# Altium PCB PELT_DRIVE.PcbDoc (part 1 of 2)
Units mm, origin at the board's own origin, x right, y up, seen from the top; angles counter-clockwise.
Board outline 100 x 36 mm, 2 copper layers (Top Layer, Bottom Layer), stack 1.071 mm thick; 61 components, 46 nets, 221 pads, 71 vias.
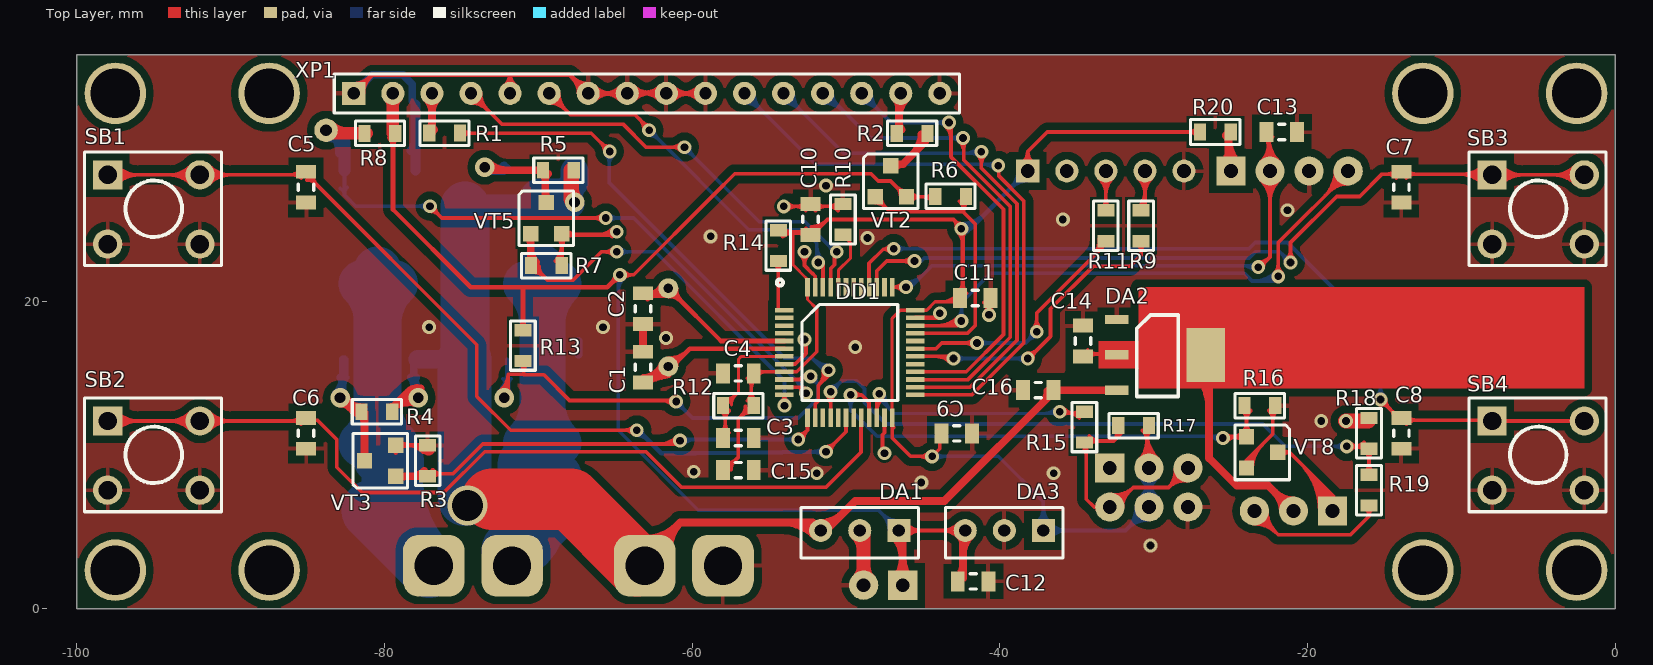
[diagram p0: Top Layer view]
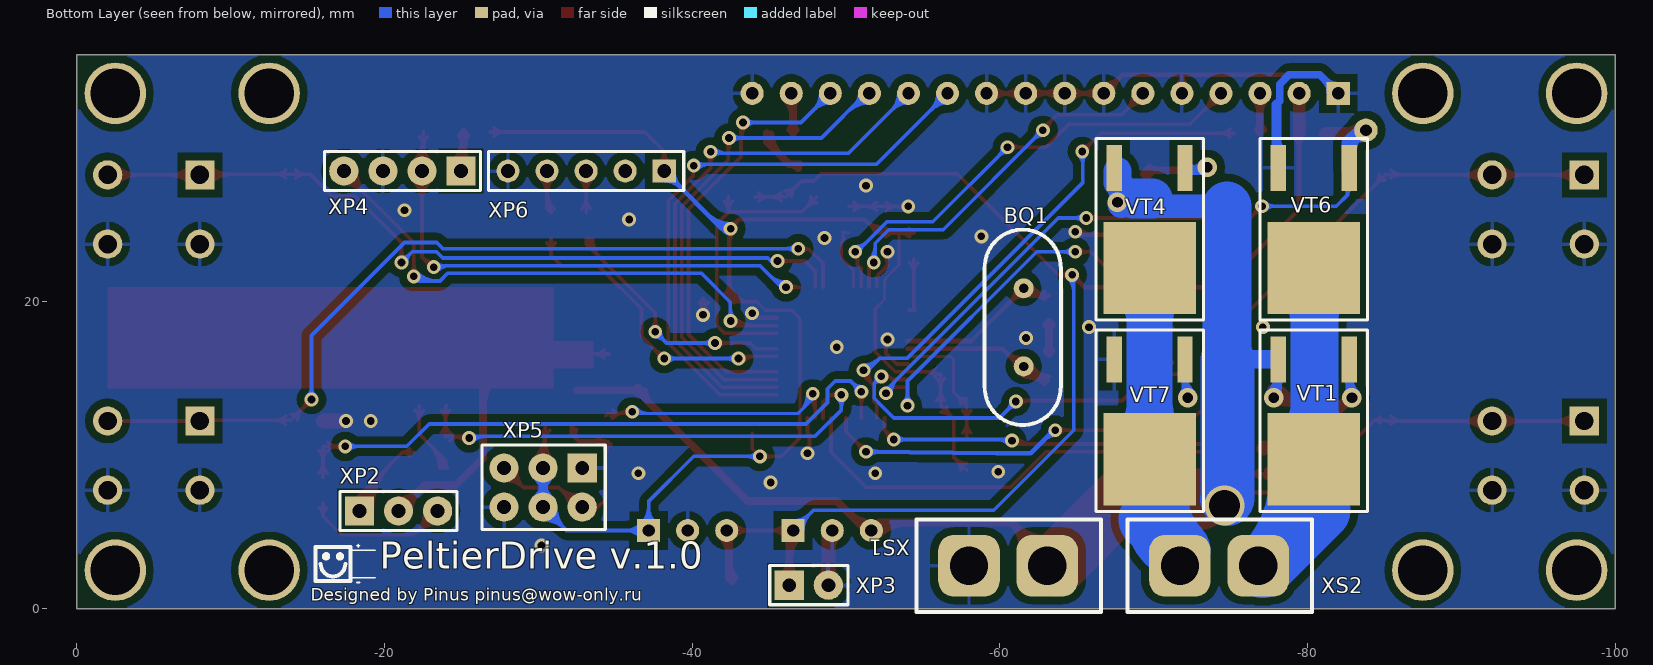
[diagram p1: Bottom Layer view, seen from below]

## Layer stack, top to bottom
Top Solder: solder mask 0.0102, Solder Resist, Dk 3.5
Top Layer: signal copper 0.0356
Dielectric1: core 1, FR-4, Dk 4.8
Bottom Layer: signal copper 0.0356
Bottom Solder: solder mask 0.0102, Solder Resist, Dk 3.5

## Board outline
-100,0 0,0 0,36 -100,36

## Design rules (kind name [scope] priority, off if disabled: settings)
Clearance Clearance_1 [InPolygon] p1: gap=0.5
Clearance [All] p2: gap=0.2
HoleSize HoleSize_1 [All] p1: absolutevalues=TRUE maxlimit=4 minlimit=0.025 maxpercent=80.000 minpercent=20.000
HoleSize [All] p2: absolutevalues=TRUE maxlimit=2.54 minlimit=0.025 maxpercent=80.000 minpercent=20.000
MinimumSolderMaskSliver MinimumSolderMaskSliver_1 [All] p1: minsoldermaskwidth=0
MinimumSolderMaskSliver [All] p2: minsoldermaskwidth=0
PlaneClearance [All] p1: clearance=1
PlaneClearance PlaneClearance_2 [All] p2: clearance=0.508
PlaneClearance PlaneClearance_1 [All] p3: clearance=0.508
PlaneConnect [All] p1: planeconnectstyle=Relief reliefexpansion=0.508 reliefentries=4 reliefconductorwidth=0.254 reliefairgap=0.5
PlaneConnect PlaneConnect_1 [All] p2: planeconnectstyle=Relief reliefexpansion=0.508 reliefentries=4 reliefconductorwidth=0.254 reliefairgap=0.254
PolygonConnect PolygonConnect_isVia [isVia] p1: connectstyle=Direct reliefconductorwidth=0.254 reliefentries=4 polygonreliefangle="90 Angle" airgapwidth=0.254
PolygonConnect [All] p2: connectstyle=Relief reliefconductorwidth=0.254 reliefentries=4 polygonreliefangle="90 Angle" airgapwidth=0.5
RoomDefinition PELT_DRIVE [InComponentClass('PELT_DRIVE')] p1: confinementstyle=ConfineIn formatcopy=TRUE lockcomponents=FALSE outline -103.97,-11.23 25.7,-11.23 25.7,38.862 -103.97,38.862
RoutingVias [All] p1: holewidth=0.711 width=1.27 viastyle="Through Hole" minholewidth=0.2 minwidth=0.6 maxholewidth=8 maxwidth=9.27
SMDToPlane [All] p1: distance=1968504
SilkToSilkClearance SilkToSilkClearance_1 [All] p1: silktosilkclearance=0
SilkToSilkClearance [All] p2: silktosilkclearance=0
SilkToSolderMaskClearance [IsPad] p1: minsilkscreentomaskgap=0 clearancetoexposedcopper=TRUE
SolderMaskExpansion [All] p1: expansion=0.1
Width Width_1 [All] p1: maxlimit=5 minlimit=0.1 preferedwidth=0.3 minimp=50.000000 maximp=50.000000 favimp=50.000000
Width [All] p2: maxlimit=5 minlimit=0.254 preferedwidth=0.254
24 further rules are at their usual default settings.

## Components (designator, comment, footprint, x,y, rotation, side; value= is the part's Value field where it differs from the comment)
BQ1 "8M" "HC 49S" -61.552,13.97 r90 bottom
C1 "20" Cap_0805 -63.2,15.7 r270 top
C2 "20" Cap_0805 -63.2,19.5 r90 top
C3 "0,01uF" Cap_0805 -57,11.1 r180 top
C4 "0.47uF" Cap_0805 -57,15.3 r0 top
C5 "0,01uF" Cap_0805 -85.1,27.4 r270 top
C6 "0,01uF" Cap_0805 -85.1,11.4 r270 top
C7 "0,01uF" Cap_0805 -13.9,27.4 r270 top
C8 "0,01uF" Cap_0805 -13.9,11.4 r270 top
C9 "0.47uF" Cap_0805 -42.8,11.4 r180 top
C10 "0.47uF" Cap_0805 -52.3,25.3 r270 top
C11 "0.47uF" Cap_0805 -41.6,20.2 r180 top
C12 "0.47uF" Cap_0805 -41.74,1.778 r180 top
C13 "100" Cap_0805 -21.674,30.988 r180 top
C14 "4,7uF" Cap_0805 -34.6,17.4 r270 top
C15 "0.47uF" Cap_0805 -57,9 r180 top
C16 "0.47uF" Cap_0805 -37.5,14.2 r0 top
DA1 "L78L05" kren -51.646,5.08 r90 top
DA2 "TLV1117 12" SOT223 -29.9,16.8 r180 top
DA3 "L78L03" kren -42.248,5.08 r90 top
DD1 "STM32F100C8T6B" LQFP48 -54,19.4 r0 top
R1 "1k" Res_0805 -76.1,30.91 r180 top
R2 "1k" Res_0805 -45.7,30.9 r180 top
R3 "1k" Res_0805 -77.2,9.616 r90 top
R4 "1k" Res_0805 -80.5,12.8 r180 top
R5 "1k" Res_0805 -68.7,28.5 r0 top
R6 "10k" Res_0805 -43.2,26.8 r0 top
R7 "1k" Res_0805 -69.484,22.3 r180 top
R8 "1k" Res_0805 -80.3,30.9 r0 top
R9 "100" Res_0805 -30.818,24.892 r270 top
R10 "10k" Res_0805 -50.2,25.3 r90 top
R11 "100" Res_0805 -33.104,24.892 r270 top
R12 "51k" Res_0805 -57,13.2 r0 top
R13 "1k" Res_0805 -71,17.1 r270 top
R14 "10" Res_0805 -54.4,23.6 r90 top
R15 "220" Res_0805 -34.5,11.8 r90 top
R16 "1k" Res_0805 -23.1,13.2 r0 top
R17 "5.1k" Res_0805 -31.3,11.9 r0 top
R18 "10k" Res_0805 -16,11.4 r270 top
R19 "27k" Res_0805 -16,7.7 r90 top
R20 "10k" Res_0805 -25.992,30.988 r180 top
SB1 "BUTTON 4.5x6" "BUTTON 6x4.5" -98,28.2 r0 top
SB2 "BUTTON 4.5x6" "BUTTON 6x4.5" -98,12.2 r0 top
SB3 "BUTTON 4.5x6" "BUTTON 6x4.5" -8,28.2 r0 top
SB4 "BUTTON 4.5x6" "BUTTON 6x4.5" -8,12.2 r0 top
VT1 "NVD5117PL" TO-252 -81.11,9.906 r0 bottom
VT2 "IRLML9303" SOT-23 -48.1,28.8 r0 top
VT3 "N-CHAN_SOT-23" SOT-23 -81.3,8.6 r90 top
VT4 "NVD5117PL" TO-252 -70.442,22.352 r0 bottom
VT5 "N-CHAN_SOT-23" SOT-23 -70.5,26.4 r0 top
VT6 "2SK3919" TO-252 -81.11,22.352 r0 bottom
VT7 "2SK3919" TO-252 -70.442,9.906 r0 bottom
VT8 "N-CHAN_SOT-23" SOT-23 -21.928,11.176 r270 top
XP1 "DISP16_2.54" DISP16_2.54 -82,33.5 r90 top
XP2 "COOLER" CONN_2.54_3 -18.372,6.35 r90 bottom
XP3 "CONNECT_2.54_2" CONN_2.54_2 -46.312,1.524 r90 bottom
XP4 "SWD" CONN_2.54_4 -24.976,28.448 r270 bottom
XP5 "PLD-6" CONN_2.54_6_2 -32.85,9.144 r270 bottom
XP6 "UART_CONN" CONN_2.54_5 -38.184,28.448 r270 bottom
XS1 "Feed" PELTIER -63.584,2.794 r270 bottom
XS2 "PELTIER" PELTIER -77.3,2.794 r270 bottom

## Footprints (in the part's own frame and the unit in brackets; to place one, negate y for a bottom-side part, rotate by r counter-clockwise, add the part's x,y. Pads: shape width x height; smd on the part's side, far side on the other; paste and mask are expansions set on the pad)
"BUTTON 6x4.5" [mm]
  round 1.9 hole 1.2: 1(6,0) 2(6,-4.5) 2_1(0,-4.5)
  rect 1.9x1.9 hole 1.2: 1_1(0,0)
  silkscreen extent -1.5,-5.9 7.4,1.5
Cap_0805 [mm] "Chip, Body 1.6x0.85mm, IPC High Density"
  rect 0.9x1.3 smd: 1(-1,0) 2(1,0)
  silkscreen extent -0.2,-0.5 0.2,0.5, body extent -1,-0.62 1,0.63, height 0.78
CONN_2.54_2 [mm]
  rect 1.9x1.9 hole 0.9: 1(0,0)
  round 1.9 hole 0.9: 2(0,-2.54)
  silkscreen extent -1.27,-3.81 1.27,1.27
CONN_2.54_3 [mm]
  rect 1.9x1.9 hole 0.9: 1(0,0)
  round 1.9 hole 0.9: 2(0,-2.54) 3(0,-5.08)
  silkscreen extent -1.27,-6.35 1.27,1.27
CONN_2.54_4 [mm]
  rect 1.9x1.9 hole 0.9: 1(0,0)
  round 1.9 hole 0.9: 2(0,-2.54) 3(0,-5.08) 4(0,-7.62)
  silkscreen extent -1.27,-8.89 1.27,1.27
CONN_2.54_5 [mm]
  rect 1.5x1.5 hole 0.9: 1(0,0)
  round 1.5 hole 0.9: 2(0,-2.54) 3(0,-5.08) 4(0,-7.62) 5(0,-10.16)
  silkscreen extent -1.27,-11.43 1.27,1.27
CONN_2.54_6_2 [mm]
  rect 1.9x1.9 hole 0.9: 1(0,0)
  round 1.9 hole 0.9: 2(2.54,0) 3(0,-2.54) 4(2.54,-2.54) 5(0,-5.08) 6(2.54,-5.08)
  silkscreen extent -1.5,-6.5 4,1.5
DISP16_2.54 [mm]
  rect 1.5x1.5 hole 0.8: 1(0,0)
  round 1.5 hole 0.8: 2(0,-2.54) 3(0,-5.08) 4(0,-7.62) 5(0,-10.16) 6(0,-12.7) 7(0,-15.24) 8(0,-17.78) 9(0,-20.32) 10(0,-22.86) 11(0,-25.4) 12(0,-27.94) 13(0,-30.48) 14(0,-33.02) 15(0,-35.56) 16(0,-38.1)
  silkscreen extent -1.27,-39.37 1.27,1.27
"HC 49S" [mm] "DIP QUARTZ"
  round 1.3 hole 0.6: 1(1.778,0) 2(6.858,0)
  silkscreen extent -2.03,-2.41 10.67,2.54
kren [mm] "L78L05"
  rect 1.5x1.5 hole 0.8: 1(0,-5.08)
  round 1.5 hole 0.8: 2(0,-2.54) 3(0,0)
  silkscreen extent -1.78,-6.35 1.5,1.27
LQFP48 [mm] "LQFP-48"
  rect 1.2x0.3 smd: 1(0,0) 2(0,-0.5) 3(0,-1) 4(0,-1.5) 5(0,-2) 6(0,-2.5) 7(0,-3) 8(0,-3.5) 9(0,-4) 10(0,-4.5) 11(0,-5) 12(0,-5.5) 25(8.5,-5.5) 26(8.5,-5) 27(8.5,-4.5) 28(8.5,-4) 29(8.5,-3.5) 30(8.5,-3) 31(8.5,-2.5) 32(8.5,-2) 33(8.5,-1.5) 34(8.5,-1) 35(8.5,-0.5) 36(8.5,0)
  rect 0.3x1.2 smd: 13(1.5,-7) 14(2,-7) 15(2.5,-7) 16(3,-7) 17(3.5,-7) 18(4,-7) 19(4.5,-7) 20(5,-7) 21(5.5,-7) 22(6,-7) 23(6.5,-7) 24(7,-7) 37(7,1.5) 38(6.5,1.5) 39(6,1.5) 40(5.5,1.5) 41(5,1.5) 42(4.5,1.5) 43(4,1.5) 44(3.5,1.5) 45(3,1.5) 46(2.5,1.5) 47(2,1.5) 48(1.5,1.5)
  silkscreen extent 1.13,-5.86 7.36,0.37, body extent -0.3,-7.34 8.84,1.8, height 1.62
PELTIER [mm] "Peltier Element"
  rrect50% 4x4 hole 2.5: 1(0,-0.508) 2(0,-5.588)
  silkscreen extent -3,-9 3,3
Res_0805 [mm]
  rect 0.8x1.1 smd: 1(-1,0) 2(1,0)
  silkscreen extent -1.6,-0.8 1.6,0.8, body extent -1,-0.62 1,0.63, height 0.5
SOT223 [mm] "SOT223"
  rect 1.5x0.6 smd: 1(2.5,-2) 2(2.5,0.3) 3(2.5,2.6)
  rect 2.5x3.5 smd: 4(-3.3,0.3)
  silkscreen extent -1.5,-2.3 1.2,3
SOT-23 [mm]
  rect 1x1 smd: 1(0,-2.032) 2(2.032,-2.032) 3(1.016,0)
  silkscreen extent -0.76,-2.79 2.79,0.76
TO-252 [mm] "TO252"
  rect 1x3 smd: 1(-1.6,-6.3) 3(3,-6.3)
  rect 6x6 smd: 2(0.7,0.2)
  silkscreen extent -2.8,-8.2 4.2,3.6

## Part data
BQ1: library part "BQ_HC 49S"
C1 C2 C3 C4 C5 C6 C7 C8 C9 C10 C11 C12 C13 C15 C16: library part Cap_0805
C14: library part Cap_0805, "4.7uF 25V X7R 10%"
DA1 DA3: library part kren
DA2: library part TLV1117, "TLV1117-sot223"
R1 R2 R3 R4 R5 R6 R7 R8 R9 R10 R11 R12 R13 R14 R15 R16 R17 R18 R19 R20: library part Res_0805
SB1 SB2 SB3 SB4: "Button"
VT1 VT4: library part P-CHAN_TO-252
VT2: library part P-CHAN_SOT-23
VT6 VT7: library part N-CHAN_TO-252
XP2: library part CONNECT_2.54_3
XP4: library part CONNECT_SWD
XP5: library part CONNECT_2.54_6_2
XP6: library part CONNECT_2.54_5
XS1: library part PELTIER

## Free pads (board coordinates)
  round 4 hole 3.2: 0(-97.5,2.5) 0(-97.5,33.5) 0(-87.5,2.5) 0(-87.5,33.5) 0(-12.5,2.5) 0(-12.5,33.5) 0(-2.5,2.5) 0(-2.5,33.5)
  round 1.524 hole 0.762: 0(-83.8,31.1)

## Via types
v1: diameter 0.9, hole 0.5, Top Layer to Bottom Layer, tented both sides, 65 vias
v2: diameter 1.27, hole 0.7, Top Layer to Bottom Layer, tented both sides, 5 vias
v3: diameter 2.6, hole 2, Top Layer to Bottom Layer, tented both sides, 1 vias

## Nets (pads, with @x,y where several pads share a name; then routed paths per layer and width w, separated by ;. In a path a pad name is that pad's centre, name@x,y a point inside that pad or via, vN(x,y) a via of type N, cw(c..) or ccw(c..) an arc to the next point about the centre after c; other vN are vias at no path point)
5V: C12.2 DA1.1 DA3.3 R6.1 R8.2 R13.1 VT2.2 XP1.2 XP3.1 | length 127
  Top Layer w0.24: -71,19.17 -71,20.9 ; v1@-64.711,21.7 -63.8,21.7 -58.58,26.92 -57.23,28.27 -48.37,28.27 -47.9,27.8 -47.1,27.8 VT2.2@-46.068,26.768 R6.1@-44.082,26.768 ; v1@-64.467,21.467 cw(c-63.903,20.903) -63.903,21.7 cw(c-63.903,22.497) v1@-64.467,21.933 ; VT2.2@-46.448,26.768 ccw(c-47.365,26.768) -46.717,27.417 ccw(c-46.068,28.065) VT2.2@-46.068,27.148 ; DA1.1@-46.312,4.826 DA1.1@-46.566,5.08 DA3.3@-42.248,5.08 DA3.3@-42.4,4.928 ; DA1.1@-46.29,4.804 cw(c-45.624,4.138) -45.624,5.08 cw(c-45.624,6.022) DA1.1@-46.29,5.356 ; DA1.1@-46.121,4.635 cw(c-45.045,3.559) -45.045,5.08 cw(c-45.045,6.601) DA1.1@-46.121,5.525 ; VT2.2@-45.799,26.499 cw(c-45.151,25.851) -45.151,26.768 cw(c-45.151,27.685) VT2.2@-45.799,27.037 ; -45.011,26.768 cw(c-45.011,25.789) R6.1@-44.319,26.481 ; -44.924,26.768 ccw(c-44.924,27.624) R6.1@-44.319,27.019 ; DA3.3@-42.693,4.635 ccw(c-43.769,3.559) -43.769,5.08 ccw(c-43.769,6.601) DA3.3@-42.693,5.525 ; DA3.3@-42.524,4.804 ccw(c-43.19,4.138) -43.19,5.08 ccw(c-43.19,6.022) DA3.3@-42.524,5.356
  Top Layer w0.3: R8.2@-79.697,30.602 cw(c-80.295,30.005) -79.45,30.005 cw(c-78.605,30.005) R8.2@-79.203,30.602 ; R8.2@-79.45,30.9 -79.45,25.95 -74.4,20.9 -71,20.9 ; R13.1@-71.248,18.197 ccw(c-71.845,18.795) -71,18.795 ccw(c-70.155,18.795) R13.1@-70.753,18.197 ; R13.1@-71,17.95 -71,20.9 ; -65.231,21.18 cw(c-64.7,20.649) v1@-64.7,21.4 ; -65.204,21.207 ccw(c-65.698,21.7) v1@-65,21.7 ; v1@-64.711,21.7 -65.511,20.9 -71,20.9
  Top Layer w0.5: DA1.1@-46.92,4.726 cw(c-48.386,3.26) -46.312,3.26 ; XP3.1@-46.807,2.019 ccw(c-48.002,3.214) -46.312,3.214 ccw(c-44.622,3.214) XP3.1@-45.817,2.019 ; XP3.1@-46.312,1.524 DA1.1@-46.312,4.826 ; C12.2@-42.767,2.005 ccw(c-43.652,2.89) -42.4,2.89 ; DA3.3@-42.602,4.726 cw(c-43.088,4.24) -42.4,4.24 ; C12.2@-42.59,1.778 -42.4,1.968 DA3.3@-42.4,4.928 ; -42.4,3.506 cw(c-40.674,3.506) DA3.3@-41.894,4.726
  Top Layer w0.8: XP1.2@-79.707,33.252 cw(c-80.305,32.655) -79.46,32.655 cw(c-78.615,32.655) XP1.2@-79.213,33.252 ; R8.2@-79.46,30.91 XP1.2@-79.46,33.5
  Bottom Layer w0.24: v1@-64.933,21.467 cw(c-65.255,21.145) -64.8,21.145 ; -64.8,20.662 cw(c-63.662,20.662) v1@-64.467,21.467 ; -64.8,21.241 cw(c-64.241,21.241) v1@-64.636,21.636 ; v1(-64.7,21.7) -64.8,21.6 -64.8,11.6 -59.6,6.4 -47.886,6.4 DA1.1@-46.566,5.08 ; DA1.1@-47.196,5.08 ccw(c-48.717,5.08) -47.641,6.155 ccw(c-46.566,7.231) DA1.1@-46.566,5.71 ; DA1.1@-46.956,5.08 ccw(c-47.898,5.08) -47.232,5.746 ccw(c-46.566,6.412) DA1.1@-46.566,5.47
+12_16V: C16.2 DA1.3 DA2.3 R4.1 R5.2 VT1.3 VT4.3 XS1.1 | length 113.4
  Top Layer w0.5: R4.1@-79.65,12.8 R4.1@-79.65,12.89 ; R4.1@-79.65,13.1 ccw(c-79.65,13.607) R4.1@-79.292,13.248 ; R4.1@-79.4,12.85 cw(c-78.7,12.85) R4.1@-79.195,13.345 ; -79.045,13.495 cw(c-78.127,12.576) v2@-77.777,13.827 ; -78.441,14.099 cw(c-77.863,13.521) v2@-77.642,14.308 ; v2@-78.187,13.649 ccw(c-78.57,13.581) -78.57,13.97 ; v2@-77.912,13.345 ccw(c-78.392,11.632) R4.1@-79.65,12.89 ; v2(-77.808,13.716) -78.062,13.97 -78.57,13.97 ; XS1.1@-63.584,2.794 -60.778,5.6 ; XS1.1@-63.076,4.044 ccw(c-63.076,5.835) XS1.1@-61.809,4.569 ; XS1.1@-63.076,4.544 ccw(c-63.076,7.542) -60.956,5.422 ; XS1.1@-61.872,3.13 cw(c-60.032,3.644) -61.383,4.995 ; XS1.1@-61.391,3.265 cw(c-59.087,3.908) -60.778,5.6 ; -54.108,5.6 cw(c-54.108,2.618) DA1.3@-52,4.726 ; -52.901,5.6 cw(c-52.901,3.825) DA1.3@-51.646,5.08 ; DA1.3@-51.646,5.58 ccw(c-51.646,7.574) -50.236,6.164 ; -37.218,13.382 ccw(c-37.986,14.15) C16.2@-36.9,14.15 ; C16.2@-36.473,14.023 cw(c-36.046,13.596) -36.046,14.2 cw(c-36.046,14.804) C16.2@-36.473,14.377 ; DA2.3@-32.5,14.2 -36.4,14.2 -43.6,7 -49.4,7 -51.32,5.08 DA1.3@-51.646,5.08 ; R4.1@-79.65,12.89 -78.57,13.97 ; -60.778,5.6 -52.166,5.6 DA1.3@-51.646,5.08
  Top Layer w1: -67.85,27.23 ccw(c-66.834,27.23) v2@-67.553,26.511 ; R5.2@-67.85,28.5 -67.85,26.618 v2(-67.648,26.416)
  Top Layer w2: v3(-74.6,6.7) -74.41,6.7 -73.998,7.112 -72.982,7.112
  Top Layer w4: -72.982,7.112 -67.902,7.112 XS1.1@-63.584,2.794
  Bottom Layer w0.5: VT1.3@-78.287,15.029 cw(c-78.714,14.602) -78.11,14.602 cw(c-77.506,14.602) VT1.3@-77.933,15.029 ; VT1.3@-78.11,15.375 ccw(c-76.149,15.375) v2@-77.536,13.988 ; VT1.3@-78.11,15.954 -78.11,14.018 v2(-77.808,13.716)
  Bottom Layer w1.2: VT1.3@-77.858,16.206 -74.646,16.206
  Bottom Layer w1.5: -74.76,26.162 -70.442,26.162 -69.934,26.67
  Bottom Layer w1.8: -68.664,26.67 VT4.3@-67.648,27.686 ; v2@-67.887,26.302 cw(c-66.786,26.824) VT4.3@-67.648,27.686 ; VT4.3@-67.648,28.446 VT4.3@-67.648,27.686
  Bottom Layer w2: v3@-74.76,7.112 -74.448,6.8 -74.548,6.7 v3(-74.6,6.7)
  Bottom Layer w2.6: -69.934,26.67 -68.664,26.67
  Bottom Layer w3.2: -74.76,16.256 -74.76,26.162
  Bottom Layer w3.5: -74.81,16.206 -74.81,7.162 v3@-74.76,7.112
+12V: C14.2 DA2.2 DA2.4 XP2.2 | length 34.9
  Top Layer w0.24: C14.2@-34.6,16.55 DA2.2@-32.45,16.55 ; C14.2@-34.281,16.281 cw(c-33.633,15.633) -33.633,16.55 cw(c-33.633,17.467) C14.2@-34.281,16.819 ; -33.405,16.55 cw(c-33.405,15.945) DA2.2@-32.977,16.373 ; -33.164,16.55 ccw(c-33.164,16.814) DA2.2@-32.977,16.627
  Top Layer w0.5: DA2.4@-27.307,15.293 cw(c-29.497,13.103) -26.4,13.103 ; DA2.4@-26.954,15.646 cw(c-28.29,14.31) -26.4,14.31 ; DA2.4@-26.6,16.5 -26.4,16.3 -26.4,9.784 -26.37,9.754 -26.354,9.754 -24.6,8 -22.562,8 XP2.2@-20.912,6.35 ; -26.4,14.069 cw(c-24.669,14.069) DA2.4@-25.893,15.293 ; XP2.2@-21.612,6.35 ccw(c-23.302,6.35) -22.107,7.545 ccw(c-20.912,8.74) XP2.2@-20.912,7.05
  Top Layer w0.8: DA2.2@-32.4,16.5 DA2.4@-26.6,16.5 ; DA2.4@-27.201,15.899 ccw(c-28.652,14.448) -28.652,16.5 ccw(c-28.652,18.552) DA2.4@-27.201,17.101
GND: C1.1 C2.1 C3.1 C4.1 C5.2 C6.2 C7.2 C8.2 C9.1 C10.1 C11.1 C12.1 C13.1 C14.1 C15.1 C16.1 DA1.2 DA2.1 DA3.2 DD1.8 DD1.23 DD1.35 DD1.47 R3.2 R7.1 R10.2 R16.2 R18.1 SB1.2 SB1.2_1 SB2.2 SB2.2_1 SB3.2 SB3.2_1 SB4.2 SB4.2_1 VT3.2 VT5.2 VT6.3 VT7.3 VT8.2 XP1.1 XP1.5 XP1.7 XP1.8 XP1.9 XP1.10 XP1.16 XP3.2 XP4.3 XP5.1 XP5.6 XP6.5 XS1.2 | length 124.2
  Top Layer w0.24: v1(-54.05,26.15) -52.3,26.15 R10.2@-50.2,26.15 ; DD1.8@-54,15.9 -53.294,15.9 -52.6,16.594 -52.6,17.5 v1(-52.7,17.5) ; v1@-53.817,25.917 cw(c-53.253,25.353) -53.253,26.15 cw(c-53.253,26.947) v1@-53.817,26.383 ; v1@-52.933,22.967 cw(c-53.497,22.403) -52.7,22.403 cw(c-51.903,22.403) v1@-52.467,22.967 ; v1(-52.7,23.2) -52.7,22.3 -52.22,21.82 -52.217,21.82 -52,21.603 DD1.47@-52,20.9 ; C10.1@-52.619,25.881 ccw(c-53.267,25.233) -53.267,26.15 ccw(c-53.267,27.067) C10.1@-52.619,26.419 ; C10.1@-51.981,25.881 cw(c-51.333,25.233) -51.333,26.15 cw(c-51.333,27.067) C10.1@-51.981,26.419 ; -50.519,25.881 ccw(c-51.167,25.233) -51.167,26.15 ccw(c-51.167,27.067) R10.2@-50.519,26.419 ; v1(-47.5,10.1) -47.632,10.232 -47.632,11.3 -47.5,11.432 DD1.23@-47.5,12.4 ; VT8.2@-24.06,9.144 cw(c-23.104,9.144) -23.78,9.82 ; VT8.2@-23.96,9.144 -23.96,9.64 -22.25,11.35 R16.2@-22.25,13.2 ; VT8.2@-23.82,9.144 cw(c-22.285,9.144) -23.37,10.23 ; VT8.2@-23.58,9.144 cw(c-21.465,9.144) -22.961,10.639 ; -22.519,12.881 cw(c-23.167,12.233) -22.25,12.233 cw(c-21.333,12.233) R16.2@-21.981,12.881
  Top Layer w0.3: XP1.1@-82,33.5 -80.8,34.7 -67.96,34.7 XP1.7@-66.76,33.5 XP1.8@-64.22,33.5 -64.22,33.54 XP1.9@-61.71,33.54 ; XP1.1@-82,34.1 ccw(c-82,35.548) -80.976,34.524 ccw(c-79.951,33.5) XP1.1@-81.4,33.5 ; -79.268,10.132 VT3.2@-79.268,10.632 R3.2@-77.366,10.632 ; VT3.2@-79.021,10.385 cw(c-78.423,9.787) -78.423,10.632 cw(c-78.423,11.477) VT3.2@-79.021,10.879 ; -78.496,10.632 cw(c-78.496,9.22) R3.2@-77.498,10.218 ; -77.772,10.632 cw(c-77.772,9.944) R3.2@-77.285,10.431 ; XP1.5@-72.2,33.98 ccw(c-72.74,34.7) -71.84,34.7 ; XP1.5@-71.84,33.5 -71.84,34.7 ; XP1.5@-71.48,33.98 cw(c-70.94,34.7) -71.84,34.7 ; R7.1@-68.882,22.597 ccw(c-69.88,23.596) -68.468,23.596 ; VT5.2@-68.715,24.121 cw(c-69.313,23.523) -68.468,23.523 cw(c-67.623,23.523) -68.221,24.121 cw(c-67.787,23.687) -67.787,24.3 ; R7.1@-68.669,22.385 ccw(c-69.156,22.871) -68.468,22.871 ; R7.1@-68.468,22.466 VT5.2@-68.468,24.368 ; VT5.2@-68.4,24.3 -65.3,24.3 v1@-65.2,24.2 ; VT5.2@-68.221,24.615 ccw(c-67.459,25.377) -67.459,24.3 ; XP1.7@-67.36,33.5 ccw(c-68.809,33.5) -67.784,34.524 ccw(c-66.76,35.548) XP1.7@-66.76,34.1 ; XP1.7@-66.336,33.076 cw(c-65.311,32.051) -65.311,33.5 cw(c-65.311,34.948) XP1.7@-66.336,33.924 ; -66.107,24.3 ccw(c-66.107,25.707) v1@-65.112,24.712 ; -65.383,24.3 ccw(c-65.383,24.983) v1(-64.9,24.5) ; XP1.8@-64.644,33.076 ccw(c-65.669,32.051) -65.669,33.5 ccw(c-65.669,34.948) XP1.8@-64.644,33.924 ; XP1.8@-64.008,33.288 cw(c-63.399,32.679) -63.399,33.54 ; XP1.8@-63.796,33.076 cw(c-62.675,31.955) -62.675,33.54 ; XP1.8@-63.796,33.924 ccw(c-62.868,34.852) -62.868,33.54 ; -63.225,33.54 cw(c-63.225,31.955) XP1.9@-62.104,33.076 ; -63.032,33.54 ccw(c-63.032,34.852) XP1.9@-62.104,33.924 ; -62.501,33.54 cw(c-62.501,32.679) XP1.9@-61.892,33.288 ; XP1.9@-61.68,33.5 -61.71,33.53 -61.71,33.5 XP1.10@-59.1,33.5 ; XP1.9@-61.256,33.076 cw(c-60.231,32.051) -60.231,33.5 cw(c-60.232,34.948) XP1.9@-61.256,33.924 ; XP1.10@-59.564,33.076 ccw(c-60.589,32.051) -60.589,33.5 ccw(c-60.588,34.948) XP1.10@-59.564,33.924 ; DD1.35@-45.5,18.9 -44.1,18.9 -44,18.9 -43.9,19 v1(-43.9,19.2) ; XP1.16@-43.9,33.6 XP1.16@-43.8,33.6 ; C11.1@-40.997,19.902 cw(c-41.716,19.184) v1@-40.7,19.184 ; v1@-40.916,19.308 ccw(c-41.178,19.561) -40.826,19.656 ccw(c-40.419,19.765) v1@-40.583,19.376 ; v1@-40.912,19.312 ccw(c-41.424,19.824) -40.7,19.824 ccw(c-39.976,19.824) v1@-40.488,19.312 ; v1@-40.849,19.36 ccw(c-41.062,19.733) -40.647,19.622 ccw(c-40.415,19.559) v1@-40.542,19.355 ; v1(-40.7,19.1) C11.1@-40.7,20.15 ; v1@-40.7,19.426 cw(c-40.026,19.426) C11.1@-40.503,19.902
  Top Layer w0.5: C1.1@-63.377,16.727 ccw(c-63.804,17.154) -63.2,17.154 ccw(c-62.596,17.154) C1.1@-63.023,16.727 ; C2.1@-63.377,18.473 cw(c-63.804,18.046) -63.2,18.046 cw(c-62.596,18.046) C2.1@-63.023,18.473 ; C1.1@-63.2,16.55 C2.1@-63.2,18.65
  Top Layer w0.9: R3.2@-77.2,10.466 R3.2@-77.148,10.414 ; DA1.2@-49.318,4.868 cw(c-50.443,3.743) -48.852,3.743 ; XP3.2@-49.206,1.878 ccw(c-50.059,2.731) -48.852,2.731 ccw(c-47.645,2.731) XP3.2@-48.498,1.878 ; DA1.2@-49.106,5.08 -48.852,4.826 XP3.2@-48.852,1.524
  Top Layer w1: v1(-17.5,12.2) R18.1@-16.05,12.2
  Bottom Layer w0.3: -78.2,32.977 -78,32.777 ; VT6.3@-77.9,28.4 VT6.3@-77.9,28.5 ; XP1.10@-59.14,33.5 XP1.10@-59.14,33.66
  Bottom Layer w0.5: XP1.1@-82,33.5 -80.8,34.7 -78.8,34.7 -78.2,34.1 -78.2,32.977 ; XP1.1@-82,34 ccw(c-82,35.207) -81.146,34.354 ccw(c-80.293,33.5) XP1.1@-81.5,33.5 ; VT7.3@-67.394,16.5 VT7.3@-67.394,17.4
  Bottom Layer w0.65: VT6.3@-78.234,29.776 ccw(c-78.798,30.34) -78,30.34 ; VT6.3@-78,28.5 -78,32.777
  other v1: -30.2,4.1 -45.1,8.2 -51.9,8.8 -36.5,8.8 -59.9,8.9 -19.1,12.2 -49.4,17 -61.7,17.6 -77.1,18.3 -65.8,18.3 -48.6,24.1 -58.8,24.2 -35.9,25.3 -21.3,25.9 -51.3,27.5
GND_CL: VT8.3 XP2.1 | length 21.6
  Top Layer w0.24: VT8.3@-21.928,10.16 -21.16,10.16 ; VT8.3@-21.626,9.929 cw(c-21.16,9.574) -21.16,10.16 ; VT8.3@-21.626,10.391 ccw(c-21.16,10.746) -21.16,10.16 ; -20.512,9.512 cw(c-23.673,6.35) XP2.1@-19.202,6.35 ; -20.102,9.102 cw(c-22.854,6.35) XP2.1@-18.962,6.35 ; -19.692,8.692 cw(c-22.034,6.35) XP2.1@-18.722,6.35 ; -19.282,8.282 cw(c-21.215,6.35) XP2.1@-18.482,6.35 ; -18.873,7.873 cw(c-20.395,6.35) XP2.1@-18.242,6.35 ; XP2.1@-18.542,7.162 ccw(c-18.586,7.372) -18.372,7.372 ; -18.463,7.463 cw(c-19.576,6.35) XP2.1@-18.002,6.35 ; XP2.1@-18.372,6.35 -18.372,7.372 ; XP2.1@-18.202,7.162 cw(c-18.158,7.372) -18.372,7.372 ; -21.16,10.16 -18.372,7.372
NetBQ1_1: BQ1.1 C1.2 DD1.6 | length 25.1
  Top Layer w0.3: C1.2@-63.115,14.815 cw(c-62.416,14.116) -62.416,15.104 ; C1.2@-62.903,14.602 cw(c-61.692,13.392) -61.692,15.104 ; C1.2@-62.768,15.104 ccw(c-62.768,16.202) BQ1.1@-61.739,15.818 ; C1.2@-62.672,14.841 ccw(c-62.89,15.654) BQ1.1@-62.051,15.713 ; -62.352,14.927 ccw(c-62.7,16.224) BQ1.1@-61.46,15.71 ; -62.336,15.104 ccw(c-62.336,16.04) BQ1.1@-61.458,15.713 ; -62.321,14.935 ccw(c-62.52,15.68) BQ1.1@-61.752,15.734 ; BQ1.1@-62.02,15.923 cw(c-63.2,16.363) -63.2,15.104 BQ1.1@-61.628,15.104 ; -61.969,15.03 ccw(c-62.151,15.706) BQ1.1@-61.452,15.755 ; -61.904,15.104 ccw(c-61.904,15.879) BQ1.1@-61.177,15.608 ; -61.765,15.084 ccw(c-61.991,15.93) BQ1.1@-61.183,15.595 ; BQ1.1@-61.552,15.948 ccw(c-61.552,17.044) -60.777,16.269 ; BQ1.1@-61.552,16.248 ccw(c-61.552,18.068) -60.265,16.781 ; BQ1.1@-61.5,15.156 -61.5,15.546 -60.146,16.9 DD1.6@-54,16.9 ; BQ1.1@-61.052,15.748 cw(c-60.458,15.748) -60.878,16.168
NetBQ1_2: BQ1.2 C2.2 DD1.5 | length 17.4
  Top Layer w0.2: BQ1.2@-61.76,20.35 BQ1.2@-61.536,20.574
  Top Layer w0.24: BQ1.2@-61.536,20.574 BQ1.2@-61.298,20.574
  Top Layer w0.3: C2.2@-62.903,20.102 cw(c-62.305,19.505) -62.305,20.35 cw(c-62.305,21.195) C2.2@-62.903,20.597 ; C2.2@-62.694,20.35 ccw(c-62.694,21.451) BQ1.2@-61.728,20.924 ; -62.189,20.35 ccw(c-62.189,21.176) BQ1.2@-61.464,20.78 ; BQ1.2@-61.991,21.068 cw(c-63.2,21.727) -63.2,20.35 BQ1.2@-61.76,20.35 ; BQ1.2@-61.552,20.328 cw(c-61.552,19.121) -60.698,19.974 cw(c-59.845,20.828) BQ1.2@-61.052,20.828 ; BQ1.2@-61.298,20.574 -58.124,17.4 DD1.5@-54,17.4
NetC3_2: C3.2 DD1.7 R12.1 | length 13.2
  Top Layer w0.2: R12.1@-57.85,13.2 -57,14.05 -57,16.2 -56.8,16.4 DD1.7@-54,16.4 ; R12.1@-57.85,13.45 ccw(c-57.85,14.054) -57.423,13.627 ; R12.1@-57.85,13.65 ccw(c-57.85,14.736) -57.082,13.968 ; -57.45,13.25 cw(c-56.605,13.25) -57.203,13.847
  Top Layer w0.24: R12.1@-58.119,12.881 cw(c-58.767,12.233) -57.85,12.233 cw(c-56.933,12.233) -57.581,12.881 ; C3.2@-58.103,11.433 ccw(c-58.611,12) -57.85,12 ; C3.2@-57.85,11.1 -57.85,12 ; R12.1@-57.85,13.2 -57.85,12 ; C3.2@-57.597,11.433 cw(c-57.089,12) -57.85,12
NetC5_1: C5.1 DD1.18 SB1.1 SB1.1_1 | length 82.7
  Top Layer w0.24: SB1.1_1@-98,28.2 SB1.1@-92,28.2 C5.1@-85.15,28.2 ; SB1.1_1@-97.583,27.783 cw(c-96.576,26.776) -96.576,28.2 cw(c-96.576,29.624) SB1.1_1@-97.583,28.617 ; SB1.1_1@-97.413,27.613 cw(c-95.996,26.196) -95.996,28.2 cw(c-95.996,30.204) SB1.1_1@-97.413,28.787 ; SB1.1@-92.587,27.613 ccw(c-94.004,26.196) -94.004,28.2 ccw(c-94.004,30.204) SB1.1@-92.587,28.787 ; SB1.1@-92.417,27.783 ccw(c-93.424,26.776) -93.424,28.2 ccw(c-93.424,29.624) SB1.1@-92.417,28.617 ; SB1.1@-91.583,27.783 cw(c-90.576,26.776) -90.576,28.2 cw(c-90.576,29.624) SB1.1@-91.583,28.617 ; SB1.1@-91.413,27.613 cw(c-89.996,26.196) -89.996,28.2 cw(c-89.996,30.204) SB1.1@-91.413,28.787 ; -86.188,28.2 ccw(c-86.188,29.288) C5.1@-85.419,28.519 ; -85.947,28.2 cw(c-85.947,27.453) C5.1@-85.419,27.981 ; C5.1@-85.1,28.25 -74,17.15 -74,13.8 -71.8,11.6 v1(-63.6,11.6) ; -85.05,27.87 cw(c-85.05,27.073) -84.487,27.637 ; C5.1@-84.67,28.25 ccw(c-83.632,28.25) -84.366,27.516 ; v1@-63.833,11.367 ccw(c-64.397,10.803) -64.397,11.6 ccw(c-64.397,12.397) v1@-63.833,11.833 ; v1(-51.3,10.2) -50,11.5 DD1.18@-50,12.4 ; v1@-51.3,10.53 ccw(c-51.3,11.327) -50.737,10.763 ccw(c-50.173,10.2) v1@-50.97,10.2
  Bottom Layer w0.24: v1(-63.6,11.6) v1@-63.5,11.6
  Bottom Layer w0.3: v1@-63.6,11.3 cw(c-63.6,10.334) -62.917,11.017 ; v1@-63.5,11.6 -62,10.1 -59.774,10.1 v1(-51.3,10.2) ; v1@-63.3,11.6 ccw(c-62.817,11.6) -63.159,11.259 ; v1@-51.515,10.41 cw(c-52.033,10.916) -52.024,10.191 cw(c-52.016,9.467) v1@-51.51,9.985
NetC6_1: C6.1 DD1.20 SB2.1 SB2.1_1 | length 75.7
  Top Layer w0.24: SB2.1_1@-98,12.2 SB2.1@-92,12.2 -85.15,12.2 -85.1,12.25 -84.35,12.25 ; SB2.1_1@-97.583,11.783 cw(c-96.576,10.776) -96.576,12.2 cw(c-96.576,13.624) SB2.1_1@-97.583,12.617 ; SB2.1_1@-97.413,11.613 cw(c-95.996,10.196) -95.996,12.2 cw(c-95.996,14.204) SB2.1_1@-97.413,12.787 ; SB2.1@-92.587,11.613 ccw(c-94.004,10.196) -94.004,12.2 ccw(c-94.004,14.204) SB2.1@-92.587,12.787 ; SB2.1@-92.417,11.783 ccw(c-93.424,10.776) -93.424,12.2 ccw(c-93.424,13.624) SB2.1@-92.417,12.617 ; SB2.1@-91.583,11.783 cw(c-90.576,10.776) -90.576,12.2 cw(c-90.576,13.624) SB2.1@-91.583,12.617 ; SB2.1@-91.413,11.613 cw(c-89.996,10.196) -89.996,12.2 cw(c-89.996,14.204) SB2.1@-91.413,12.787 ; -86.188,12.2 ccw(c-86.188,13.288) C6.1@-85.419,12.519 ; -85.947,12.2 cw(c-85.947,11.453) C6.1@-85.419,11.981 ; C6.1@-84.731,12.043 cw(c-84.35,11.795) -84.35,12.25 ; C6.1@-84.731,12.457 ccw(c-84.35,12.705) -84.35,12.25 ; DD1.20@-49,12.4 -49.03,12.37 -49.03,10.17 -51.3,7.9 -60.7,7.9 -63,10.2 -73.492,10.2 -76.142,7.55 -81.45,7.55 -83.1,9.2 -83.1,11 -84.35,12.25
NetC7_1: C7.1 DD1.39 SB3.1 SB3.1_1 | length 74.9
  Top Layer w0.24: DD1.39@-48,20.9 -48,21.955 -47.356,22.6 -45.556,22.6 v1(-45.55,22.606) v1@-45.328,22.828 ; -46.361,22.6 ccw(c-46.361,23.417) v1@-45.783,22.839 ; -46.332,22.6 cw(c-46.332,21.824) v1@-45.783,22.373 ; v1@-21.333,22.733 ccw(c-21.897,23.297) -21.1,23.297 ccw(c-20.303,23.297) v1@-20.867,22.733 ; v1(-21.1,22.5) -21.1,23.8 -18.1,26.8 -16.6,26.8 -15.15,28.25 -13.9,28.25 -8.05,28.25 SB3.1_1@-8,28.2 SB3.1@-2,28.2 ; C7.1@-14.219,27.981 ccw(c-14.867,27.333) -14.867,28.25 ccw(c-14.867,29.167) C7.1@-14.219,28.519 ; C7.1@-13.581,27.981 cw(c-12.933,27.333) -12.933,28.25 cw(c-12.933,29.167) C7.1@-13.581,28.519 ; -10.125,28.25 cw(c-10.125,26.075) SB3.1_1@-8.587,27.613 ; -9.883,28.25 ccw(c-9.883,30.083) SB3.1_1@-8.587,28.787 ; -9.545,28.25 cw(c-9.545,26.655) SB3.1_1@-8.417,27.783 ; -9.304,28.25 ccw(c-9.304,29.504) SB3.1_1@-8.417,28.617 ; -8.966,28.25 cw(c-8.966,27.234) SB3.1_1@-8.247,27.953 ; SB3.1_1@-7.583,27.783 cw(c-6.576,26.776) -6.576,28.2 cw(c-6.576,29.624) SB3.1_1@-7.583,28.617 ; SB3.1_1@-7.413,27.613 cw(c-5.996,26.196) -5.996,28.2 cw(c-5.996,30.204) SB3.1_1@-7.413,28.787 ; SB3.1@-2.587,27.613 ccw(c-4.004,26.196) -4.004,28.2 ccw(c-4.004,30.204) SB3.1@-2.587,28.787 ; SB3.1@-2.417,27.783 ccw(c-3.424,26.776) -3.424,28.2 ccw(c-3.424,29.624) SB3.1@-2.417,28.617
  Bottom Layer w0.24: v1(-45.55,22.606) -45.106,22.606 -44.912,22.8 -23.778,22.8 -23.378,23.2 -21.8,23.2 v1(-21.1,22.5) ; v1@-21.43,22.5 ccw(c-22.227,22.5) -21.663,23.063 ccw(c-21.1,23.627) v1@-21.1,22.83
NetC8_1: C8.1 DD1.40 SB4.1 SB4.1_1 | length 63.5
  Top Layer w0.24: DD1.40@-48.5,20.9 -48.5,22.45 -47.582,23.368 ; v1@-47.173,23.585 cw(c-47.582,23.861) -47.582,23.368 ; v1@-47.142,23.176 ccw(c-47.582,22.769) -47.582,23.368 ; v1(-46.9,23.4) -47.211,23.4 -47.243,23.368 -47.582,23.368 ; v1@-15.25,13.27 cw(c-15.25,12.473) -14.687,13.037 cw(c-14.123,13.6) v1@-14.92,13.6 ; v1(-15.25,13.6) -13.9,12.25 SB4.1_1@-8.05,12.25 ; -14.634,12.984 cw(c-15.368,12.25) C8.1@-14.33,12.25 ; -14.513,12.863 ccw(c-13.95,13.427) C8.1@-13.95,12.63 ; C8.1@-13.581,11.981 cw(c-12.933,11.333) -12.933,12.25 cw(c-12.933,13.167) C8.1@-13.581,12.519 ; SB4.1_1@-8,12.2 SB4.1@-2,12.2
  Bottom Layer w0.24: v1@-47,23.4 v1(-46.9,23.4) -23.8,23.4 -23.4,23.8 -21.3,23.8 -15.25,17.75 v1(-15.25,13.6) ; v1@-46.667,23.167 cw(c-46.103,22.603) -46.103,23.4 cw(c-46.103,24.197) v1@-46.667,23.633 ; v1@-15.483,13.833 ccw(c-16.047,14.397) -15.25,14.397 ccw(c-14.453,14.397) v1@-15.017,13.833
NetC13_2: C13.2 DD1.37 XP4.2 | length 53.3
  Top Layer w0.24: DD1.37@-47,20.9 v1(-46.1,20.9) ; v1@-46.333,20.667 ccw(c-46.897,20.103) -46.897,20.9 ccw(c-46.897,21.697) v1@-46.333,21.133 ; v1@-23.3,22 -22.436,22.864 XP4.2@-22.436,28.448 ; v1@-23.2,22.53 ccw(c-23.2,23.568) -22.466,22.834 ; XP4.2@-23.023,27.861 cw(c-24.44,26.444) -22.436,26.444 cw(c-20.432,26.444) XP4.2@-21.849,27.861 ; XP4.2@-23.023,29.035 ccw(c-24.227,30.239) -22.524,30.239 ; v1@-22.87,22.2 cw(c-22.315,22.2) -22.707,22.593 ; XP4.2@-22.853,28.031 cw(c-23.86,27.024) -22.436,27.024 cw(c-21.012,27.024) XP4.2@-22.019,28.031 ; XP4.2@-22.853,28.865 ccw(c-23.648,29.66) -22.524,29.66 ; C13.2@-22.793,30.669 cw(c-23.441,30.021) -22.524,30.021 cw(c-21.607,30.021) C13.2@-22.255,30.669 ; XP4.2@-22.524,28.536 C13.2@-22.524,30.988 ; -22.524,29.505 ccw(c-21.379,29.505) XP4.2@-22.189,28.695 ; -22.524,30.085 ccw(c-20.799,30.085) XP4.2@-22.019,28.865 ; C13.2@-22.524,30.664 ccw(c-20.22,30.664) XP4.2@-21.849,29.035
  Bottom Layer w0.24: v1(-46.1,20.9) -45.8,20.9 -44.4,22.3 -23.3,22.3 -23.3,22 -23.2,22.1 v1(-23.2,22.2) ; v1@-46.1,20.99 ccw(c-46.1,21.932) -45.434,21.266 ; v1@-46.1,21.23 ccw(c-46.1,22.751) -45.025,21.675 ; -24.238,22.3 cw(c-24.238,21.162) v1@-23.433,21.967 ; -23.755,22.3 ccw(c-23.755,22.755) v1@-23.433,22.433 ; -23.659,22.3 cw(c-23.659,21.741) v1@-23.264,22.136
NetDD1_1: DD1.1 R14.1 | length 5.3
  Top Layer w0.24: R14.1@-54.669,22.481 cw(c-55.317,21.833) -54.4,21.833 cw(c-53.483,21.833) R14.1@-54.131,22.481 ; DD1.1@-54.471,19.421 ccw(c-54.643,19.593) -54.4,19.593 ; R14.1@-54.4,22.75 -54.4,19.4 DD1.1@-54.1,19.4
NetDD1_10: DD1.10 R13.2 VT7.1 | length 44.9
  Top Layer w0.24: v2@-72.526,14.13 ccw(c-73.345,15.24) -71.966,15.24 ; v2@-72.383,13.937 ccw(c-72.994,14.764) -71.966,14.764 ; v2(-72.22,13.716) -71.966,13.97 -71.966,15.24 ; -71.966,14.346 ccw(c-71.59,14.346) v2@-71.856,14.08 ; R13.2@-71.242,16.008 -71,16.25 -70.95,16.2 -70.95,15.24 -71.966,15.24 ; R13.2@-71.219,15.981 cw(c-71.867,15.333) -70.95,15.333 cw(c-70.033,15.333) R13.2@-70.681,15.981 ; -70.95,15.2 -69.64,15.2 -67.97,13.53 -61.112,13.53 v1(-61.044,13.462) ; -62.005,13.53 cw(c-62.005,12.501) v1@-61.277,13.229 ; -61.677,13.53 ccw(c-61.677,14.095) v1@-61.277,13.695 ; DD1.10@-54,14.9 -53,14.9 -52.8,15.1 ; v1@-52.603,14.97 ccw(c-52.8,14.886) -52.8,15.1 ; v1@-52.603,15.23 cw(c-52.8,15.314) -52.8,15.1 ; v1(-52.3,15.1) -52.8,15.1
  Bottom Layer w0.24: v2@-72.584,14.08 ccw(c-73.893,15.389) VT7.1@-72.042,15.389 ; v2@-72.425,14.189 ccw(c-72.786,15.022) -71.908,14.787 ccw(c-70.946,14.529) v2@-71.786,13.993 ; v2@-72.414,13.91 ccw(c-73.314,14.81) VT7.1@-72.042,14.81 ; VT7.1@-72.311,14.937 cw(c-72.959,14.289) -72.042,14.289 cw(c-71.125,14.289) VT7.1@-71.773,14.937 ; v2@-72.042,14.046 VT7.1@-72.042,16.206 ; -72.042,14.53 ccw(c-71.406,14.53) v2@-71.856,14.08 ; v1@-61.044,13.132 cw(c-61.044,12.335) -60.481,12.899 cw(c-59.917,13.462) v1@-60.714,13.462 ; v1(-61.044,13.462) -59.982,12.4 -53.1,12.4 -52.64,12.86 -52.281,13.219 -52.281,13.23 -51.83,13.681 -51.83,14.63 ; v1@-52.255,14.773 cw(c-52.187,14.273) -51.83,14.63 ; v1@-52,15.2 -52.4,15.2 -51.83,14.63 ; v1@-51.973,15.055 ccw(c-51.473,14.987) -51.83,14.63